# Altium PCB MasterBoard (SurfaceMount).PcbDoc (part 2 of 3)
Units mil, origin at the board's own origin, x right, y up, seen from the top; angles counter-clockwise.
Board outline 2893 x 3176 mil, 4 copper layers (Top Layer, GROUND, POWER, Bottom Layer), stack 23.756 mil thick; 101 components, 58 nets, 327 pads, 95 vias.
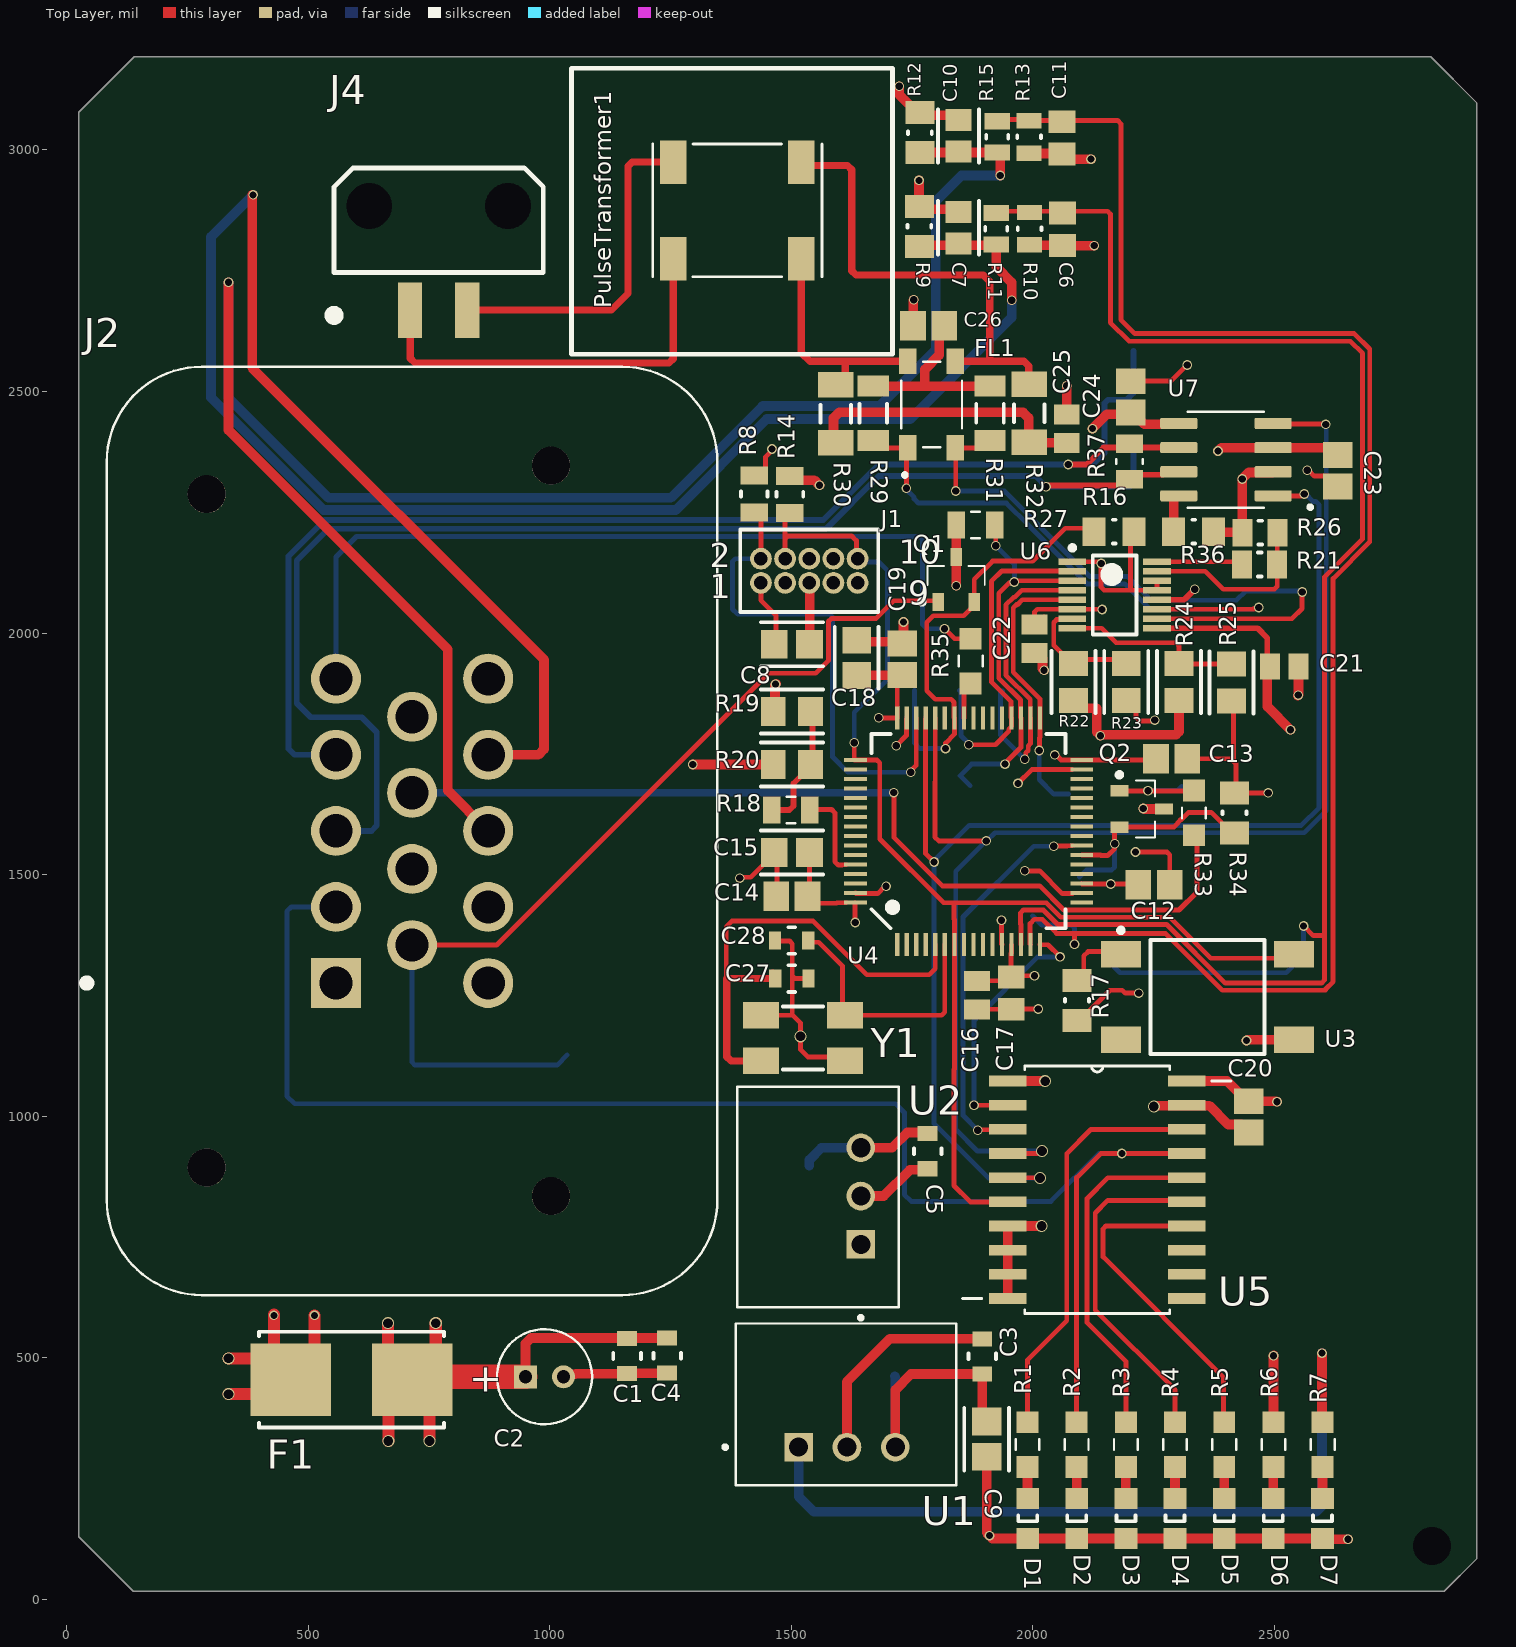
[diagram p0: Top Layer view]

## Part data (continued)
R7: "RES SMD 665 OHM 1% 1/2W 0805", Case Code (Imperial)=0805, Case Code (Metric)=2012, Manufacturer 1=Panasonic, Manufacturer Part Number 1=ERJ-P06F6650V, Max Operating Temperature=155°C, Max Power Dissipation=500mW, Min Operating Temperature=-55°C, Package=None, Package Quantity=5000, Resistance=160R, Resistor Type="Thick Film", Supplier Part Number 1=P16076CT-ND, Temperature Coefficient=200ppm/°C, Tolerance=5%, Voltage Rating=150V, Availability=Unavailable, Case/Package=0805, Category="Chip SMD Resistors", ComponentLink1Description=http://www.mouser.com/ds/2/315/AOA0000CE4-64075.pdf?src-supplier=Mouser, ComponentLink1URL=http://www.mouser.com/ds/2/315/AOA0000CE4-64075.pdf?src-supplier=Mouser, ComponentLink2Description=http://www.onlinecomponents.com/datasheet/erj-p06j161v.aspx?p=44459141&src-supplier=Onlinecomponents.com, ComponentLink2URL=http://www.onlinecomponents.com/datasheet/erj-p06j161v.aspx?p=44459141&src-supplier=Onlinecomponents.com, ComponentLink3Description=https://industrial.panasonic.com/cdbs/www-data/pdf/RDO0000/AOA0000C331.pdf?src-supplier=Digi-Key, ComponentLink3URL=https://industrial.panasonic.com/cdbs/www-data/pdf/RDO0000/AOA0000C331.pdf?src-supplier=Digi-Key, ComponentLink4Description=https://industrial.panasonic.com/ww/system/files/data/download/catalog/id_fixed-resistors_e_1.pdf?src-supplier=Digi-Key, ComponentLink4URL=https://industrial.panasonic.com/ww/system/files/data/download/catalog/id_fixed-resistors_e_1.pdf?src-supplier=Digi-Key, ComponentLink5Description=http://industrial.panasonic.com/www-data/pdf/AOA0000/AOA0000CE4.pdf?src-supplier=Avnet, ComponentLink5URL=http://industrial.panasonic.com/www-data/pdf/AOA0000/AOA0000CE4.pdf?src-supplier=Avnet, ComponentLink6Description=http://industrial.panasonic.com/www-data/pdf/AOA0000/AOA0000CE4.pdf?src-supplier=Avnet+Europe, ComponentLink6URL=http://industrial.panasonic.com/www-data/pdf/AOA0000/AOA0000CE4.pdf?src-supplier=Avnet+Europe, ComponentLink7Description=https://datasheet.ciiva.com/24126/aoa0000ce4-64075-24126826.pdf?src-supplier=Mouser, ComponentLink7URL=https://datasheet.ciiva.com/24126/aoa0000ce4-64075-24126826.pdf?src-supplier=Mouser, ComponentLink8Description=https://datasheet.ciiva.com/22721/1801181-22721149.pdf?src-supplier=Farnell, ComponentLink8URL=https://datasheet.ciiva.com/22721/1801181-22721149.pdf?src-supplier=Farnell, ComponentLink9Description=https://datasheet.ciiva.com/46383/1801181-46383229.pdf?src-supplier=Element14, ComponentLink9URL=https://datasheet.ciiva.com/46383/1801181-46383229.pdf?src-supplier=Element14, Contact Plating=Tin, Features="Automotive AEC-Q200", Height=0.028inch, Lead Free="Contains Lead", Length=0.079inch, Mount="Surface Mount", MP=ERJP06J161V, Number of Terminations=2, Packaging="Tape and Reel", Power Rating=500mW, Price=None, Pricing 1="1=0.18000, 10=0.15400, 100=0.06030, 1000=0.02525, 2500=0.02315 (USD)", Radiation Hardening=No, REACH SVHC="No SVHC", RoHS=Yes, RoHS Compliant=Yes, Series=ERJ, Stock 1=364, Supplier 1=Digi-Key, Termination=SMD/SMT, Voltage Rating (DC)=150V, Weight=0.000194oz, Width=1.2mm
R8 R14: library part CMP-2001-04899-2, "RES Thick Film, 100kΩ, 1%, 0.125W, 100ppm/°C, 0805", Case Code (Imperial)=0805, Case Code (Metric)=2012, Manufacturer 1=Vishay, Max Operating Temperature=155°C, Max Power Dissipation=125mW, Min Operating Temperature=-55°C, Package Quantity=5000, Resistance=100kR, Resistance Tolerance=1%, Resistor Type="Thick Film", Supplier Part Number 1=541-100KCCT-ND, Temperature Coefficient=100ppm/°C, Voltage Rating=150V, Case/Package=0805, Category="Chip SMD Resistors", ComponentLink1Description=https://datasheet.ciiva.com/11809/0900766b80d98b26-11809057.pdf?src-supplier=RSComponents, ComponentLink1URL=https://datasheet.ciiva.com/11809/0900766b80d98b26-11809057.pdf?src-supplier=RSComponents, ComponentLink2Description=https://datasheet.ciiva.com/8337/dcrcwe3-8337738.pdf?src-supplier=Avnet, ComponentLink2URL=https://datasheet.ciiva.com/8337/dcrcwe3-8337738.pdf?src-supplier=Avnet, ComponentLink3Description=https://datasheet.ciiva.com/3258/dcrcwe3-3258006.pdf?src-supplier=Avnet, ComponentLink3URL=https://datasheet.ciiva.com/3258/dcrcwe3-3258006.pdf?src-supplier=Avnet, ComponentLink4Description=https://datasheet.ciiva.com/16754/70201119-16754822.pdf?src-supplier=Allied+Electronics, ComponentLink4URL=https://datasheet.ciiva.com/16754/70201119-16754822.pdf?src-supplier=Allied+Electronics, ComponentLink5Description=https://datasheet.ciiva.com/7777/1697337-7777349.pdf?src-supplier=Element14, ComponentLink5URL=https://datasheet.ciiva.com/7777/1697337-7777349.pdf?src-supplier=Element14, ComponentLink6Description=https://datasheet.ciiva.com/7777/1720486-7777565.pdf?src-supplier=Element14, ComponentLink6URL=https://datasheet.ciiva.com/7777/1720486-7777565.pdf?src-supplier=Element14, ComponentLink7Description=https://datasheet.ciiva.com/16341/dcrcwe3-16341530.pdf?src-supplier=Future+Electronics, ComponentLink7URL=https://datasheet.ciiva.com/16341/dcrcwe3-16341530.pdf?src-supplier=Future+Electronics, ComponentLink8Description=https://datasheet.ciiva.com/16852/dcrcwe3-16852810.pdf?src-supplier=Avnet+Europe, ComponentLink8URL=https://datasheet.ciiva.com/16852/dcrcwe3-16852810.pdf?src-supplier=Avnet+Europe, ComponentLink9Description=https://datasheet.ciiva.com/16720/70201119-16720891.pdf?src-supplier=Allied+Electronics, ComponentLink9URL=https://datasheet.ciiva.com/16720/70201119-16720891.pdf?src-supplier=Allied+Electronics, Composition="Thick Film", Construction=Rectangular, Contact Plating=Tin, Depth=1.25mm, Features="Automotive AEC-Q200", Height=0.45mm, Lead Free="Lead Free", Length=2mm, Manufacturer Part Number 1=CRCW0805100KFKEA, Military Standard=Not, Mount="Surface Mount", Number of Pins=2, Number of Terminations=2, Packaging="Tape and Reel", Power Rating=125mW, Pricing 1="1=0.10000, 10=0.06700, 100=0.02710, 1000=0.01219, 2500=0.01058 (USD)", Radiation Hardening=No, REACH SVHC=Unknown, RoHS=Yes, RoHS Compliant=Yes, Series=CRCW, Size Code=0805, Stock 1=135309, Supplier 1=Digi-Key, Technology="THICK FILM", Termination=SMD/SMT, Tolerance=1%, Voltage Rating (DC)=150V, Weight=0.000194oz, Width=1.25mm
R9 R12: library part CMP-2001-04934-2, "RES Thick Film, 12kΩ, 1%, 0.125W, 100ppm/°C, 0805", Case Code (Imperial)=0805, Case Code (Metric)=2012, Manufacturer 1=Vishay, Max Operating Temperature=155°C, Max Power Dissipation=125mW, Min Operating Temperature=-55°C, Package Quantity=10, Resistance=12kR, Resistance Tolerance=1%, Resistor Type="Thick Film", Supplier Part Number 1=541-12.0KCCT-ND, Temperature Coefficient=100ppm/°C, Voltage Rating=150V, Case/Package=0805, Category="Chip SMD Resistors", ComponentLink1Description=https://datasheet.ciiva.com/11809/0900766b80d98b26-11809216.pdf?src-supplier=RSComponents, ComponentLink1URL=https://datasheet.ciiva.com/11809/0900766b80d98b26-11809216.pdf?src-supplier=RSComponents, ComponentLink2Description=https://datasheet.ciiva.com/2467/dcrcwe3-2467344.pdf?src-supplier=Digi-Key, ComponentLink2URL=https://datasheet.ciiva.com/2467/dcrcwe3-2467344.pdf?src-supplier=Digi-Key, ComponentLink3Description=https://datasheet.ciiva.com/2467/dcrcwe3-2467345.pdf?src-supplier=Digi-Key, ComponentLink3URL=https://datasheet.ciiva.com/2467/dcrcwe3-2467345.pdf?src-supplier=Digi-Key, ComponentLink4Description=https://datasheet.ciiva.com/2467/dcrcwe3-2467346.pdf?src-supplier=Digi-Key, ComponentLink4URL=https://datasheet.ciiva.com/2467/dcrcwe3-2467346.pdf?src-supplier=Digi-Key, ComponentLink5Description=https://datasheet.ciiva.com/16883/dcrcwe3-16883879.pdf?src-supplier=Avnet+Europe, ComponentLink5URL=https://datasheet.ciiva.com/16883/dcrcwe3-16883879.pdf?src-supplier=Avnet+Europe, ComponentLink6Description=https://datasheet.ciiva.com/16397/dcrcw-16397325.pdf?src-supplier=Future+Electronics, ComponentLink6URL=https://datasheet.ciiva.com/16397/dcrcw-16397325.pdf?src-supplier=Future+Electronics, ComponentLink7Description=https://datasheet.ciiva.com/7841/1697337-7841630.pdf?src-supplier=Element14, ComponentLink7URL=https://datasheet.ciiva.com/7841/1697337-7841630.pdf?src-supplier=Element14, ComponentLink8Description=https://datasheet.ciiva.com/16777/70201119-16777994.pdf?src-supplier=Allied+Electronics, ComponentLink8URL=https://datasheet.ciiva.com/16777/70201119-16777994.pdf?src-supplier=Allied+Electronics, Composition="Thick Film", Construction=Rectangular, Contact Plating=Tin, Depth=1.25mm, Features="Automotive AEC-Q200", Height=0.45mm, Lead Free="Lead Free", Length=2mm, Manufacturer Part Number 1=CRCW080512K0FKEA, Military Standard=Not, Mount="Surface Mount", Number of Terminations=2, Packaging="Tape and Reel", Power Rating=125mW, Pricing 1="1=0.10000, 10=0.06700, 100=0.02710, 1000=0.01219, 2500=0.01058 (USD)", Radiation Hardening=No, REACH SVHC=Unknown, RoHS=Yes, RoHS Compliant=Yes, Series=CRCW, Size Code=0805, Stock 1=2287, Supplier 1=Digi-Key, Technology="THICK FILM", Termination=SMD/SMT, Tolerance=1%, Voltage Rating (DC)=150V, Weight=0.000194oz, Width=0.049inch
R10 R13: library part CMP-2001-03873-2, "RES Thick Film, 3.09kΩ, 1%, 0.125W, 100ppm/°C, 0805", Case Code (Imperial)=0805, Case Code (Metric)=2012, Manufacturer 1=Vishay, Max Operating Temperature=155°C, Max Power Dissipation=125mW, Min Operating Temperature=-55°C, Package Quantity=10, Resistance=3.09kR, Resistance Tolerance=1%, Resistor Type="Thick Film", Supplier Part Number 1=541-3.09KCCT-ND, Temperature Coefficient=100ppm/°C, Voltage Rating=150V, Case/Package=0805, Category="Chip SMD Resistors", ComponentLink1Description=https://datasheet.ciiva.com/9081/dcrcwe3-9081688.pdf?src-supplier=Avnet, ComponentLink1URL=https://datasheet.ciiva.com/9081/dcrcwe3-9081688.pdf?src-supplier=Avnet, ComponentLink2Description=https://datasheet.ciiva.com/2467/dcrcwe3-2467557.pdf?src-supplier=Digi-Key, ComponentLink2URL=https://datasheet.ciiva.com/2467/dcrcwe3-2467557.pdf?src-supplier=Digi-Key, ComponentLink3Description=https://datasheet.ciiva.com/2467/dcrcwe3-2467558.pdf?src-supplier=Digi-Key, ComponentLink3URL=https://datasheet.ciiva.com/2467/dcrcwe3-2467558.pdf?src-supplier=Digi-Key, ComponentLink4Description=https://datasheet.ciiva.com/2467/dcrcwe3-2467559.pdf?src-supplier=Digi-Key, ComponentLink4URL=https://datasheet.ciiva.com/2467/dcrcwe3-2467559.pdf?src-supplier=Digi-Key, ComponentLink5Description=https://datasheet.ciiva.com/5549/dcrcwe3-109170-5549629.pdf?src-supplier=Mouser, ComponentLink5URL=https://datasheet.ciiva.com/5549/dcrcwe3-109170-5549629.pdf?src-supplier=Mouser, ComponentLink6Description=https://datasheet.ciiva.com/7670/1697337-7670298.pdf?src-supplier=Element14, ComponentLink6URL=https://datasheet.ciiva.com/7670/1697337-7670298.pdf?src-supplier=Element14, ComponentLink7Description=https://datasheet.ciiva.com/7670/1697337-7670299.pdf?src-supplier=Element14, ComponentLink7URL=https://datasheet.ciiva.com/7670/1697337-7670299.pdf?src-supplier=Element14, ComponentLink8Description=https://datasheet.ciiva.com/22675/1847332-22675199.pdf?src-supplier=Element14, ComponentLink8URL=https://datasheet.ciiva.com/22675/1847332-22675199.pdf?src-supplier=Element14, ComponentLink9Description=https://datasheet.ciiva.com/7178/1635184-7178791.pdf?src-supplier=Newark, ComponentLink9URL=https://datasheet.ciiva.com/7178/1635184-7178791.pdf?src-supplier=Newark, ComponentLink10Description=https://datasheet.ciiva.com/22871/70201119-22871769.pdf?src-supplier=Allied+Electronics, ComponentLink10URL=https://datasheet.ciiva.com/22871/70201119-22871769.pdf?src-supplier=Allied+Electronics, ComponentLink11Description=https://datasheet.ciiva.com/16780/70201119-16780488.pdf?src-supplier=Allied+Electronics, ComponentLink11URL=https://datasheet.ciiva.com/16780/70201119-16780488.pdf?src-supplier=Allied+Electronics, Composition="Thick Film", Construction=Rectangular, Contact Plating=Tin, Depth=1.25mm, Features="Automotive AEC-Q200", Height=0.02inch, Lead Free="Lead Free", Length=2mm, Manufacturer 2=Vishay, Manufacturer 3=Vishay, Manufacturer Part Number 1=CRCW08053K09FKEA, Manufacturer Part Number 2=CRCW08053K09FKEA, Manufacturer Part Number 3=CRCW08053K09FKEA, Military Standard=Not, Number of Pins=2, Number of Terminations=2, Packaging="Tape and Reel", Power Rating=125mW, Pricing 1="1=0.10000, 10=0.06700, 100=0.02710, 1000=0.01219, 2500=0.01058 (USD)", Pricing 2="1=0.10000, 10=0.06700, 100=0.02710, 1000=0.01219, 2500=0.01058 (USD)", Pricing 3="1=0.18000, 10=0.06800, 50=0.06800, 100=0.02800, 1000=0.01500, 10000=0.00900 (USD)", Radiation Hardening=No, REACH SVHC=Unknown, RoHS=Yes, RoHS Compliant=Yes, Series=CRCW, Size Code=0805, Stock 1=4900, Stock 2=4900, Stock 3=6174, Supplier 1=Digi-Key, Supplier 2=Digi-Key, Supplier 3=Mouser, Supplier Part Number 2=541-3.09KCDKR-ND, Supplier Part Number 3=71-CRCW0805-3.09K-E3, Technology="THICK FILM", Termination=Solder, Tolerance=1%, Voltage Rating (DC)=150V, Weight=0.000194oz, Width=0.049inch
R11 R15: library part CMP-1013-00531-2, Case Code (Imperial)=0805, Case Code (Metric)=2012, Manufacturer="Vishay Dale", Manufacturer 1=Vishay, Max Operating Temperature=155°C, Max Power Dissipation=125mW, Min Operating Temperature=-55°C, Package Quantity=5000, Resistance=1.6kR, Resistance Tolerance=1%, Resistor Type="Thick Film", Supplier Part Number 1=541-1.60KCCT-ND, Temperature Coefficient=100ppm/°C, Voltage Rating=150V, Case/Package=0805, Category="Chip SMD Resistors", ComponentLink1Description=https://datasheet.ciiva.com/11808/0900766b80d98b26-11808292.pdf?src-supplier=RSComponents, ComponentLink1URL=https://datasheet.ciiva.com/11808/0900766b80d98b26-11808292.pdf?src-supplier=RSComponents, ComponentLink2Description=https://datasheet.ciiva.com/5542/dcrcwe3-109170-5542582.pdf?src-supplier=Mouser, ComponentLink2URL=https://datasheet.ciiva.com/5542/dcrcwe3-109170-5542582.pdf?src-supplier=Mouser, ComponentLink3Description=https://datasheet.ciiva.com/2495/dcrcwe3-2495824.pdf?src-supplier=Digi-Key, ComponentLink3URL=https://datasheet.ciiva.com/2495/dcrcwe3-2495824.pdf?src-supplier=Digi-Key, ComponentLink4Description=https://datasheet.ciiva.com/2495/dcrcwe3-2495825.pdf?src-supplier=Digi-Key, ComponentLink4URL=https://datasheet.ciiva.com/2495/dcrcwe3-2495825.pdf?src-supplier=Digi-Key, ComponentLink5Description=https://datasheet.ciiva.com/2495/dcrcwe3-2495826.pdf?src-supplier=Digi-Key, ComponentLink5URL=https://datasheet.ciiva.com/2495/dcrcwe3-2495826.pdf?src-supplier=Digi-Key, ComponentLink6Description=https://datasheet.ciiva.com/26312/fld-crcw-e3-data-en-26312927.pdf?src-supplier=Distrelec, ComponentLink6URL=https://datasheet.ciiva.com/26312/fld-crcw-e3-data-en-26312927.pdf?src-supplier=Distrelec, ComponentLink7Description=https://datasheet.ciiva.com/7670/1697337-7670266.pdf?src-supplier=Element14, ComponentLink7URL=https://datasheet.ciiva.com/7670/1697337-7670266.pdf?src-supplier=Element14, ComponentLink8Description=https://datasheet.ciiva.com/7670/1697337-7670267.pdf?src-supplier=Element14, ComponentLink8URL=https://datasheet.ciiva.com/7670/1697337-7670267.pdf?src-supplier=Element14, ComponentLink9Description=https://datasheet.ciiva.com/22700/1697337-22700735.pdf?src-supplier=Element14, ComponentLink9URL=https://datasheet.ciiva.com/22700/1697337-22700735.pdf?src-supplier=Element14, ComponentLink10Description=https://datasheet.ciiva.com/16852/dcrcwe3-16852921.pdf?src-supplier=Avnet+Europe, ComponentLink10URL=https://datasheet.ciiva.com/16852/dcrcwe3-16852921.pdf?src-supplier=Avnet+Europe, ComponentLink11Description=https://datasheet.ciiva.com/7725/66915-7725838.pdf?src-supplier=Element14, ComponentLink11URL=https://datasheet.ciiva.com/7725/66915-7725838.pdf?src-supplier=Element14, ComponentLink12Description=https://datasheet.ciiva.com/22683/1847332-22683309.pdf?src-supplier=Element14, ComponentLink12URL=https://datasheet.ciiva.com/22683/1847332-22683309.pdf?src-supplier=Element14, Construction=Rectangular, Contact Plating=Tin, Depth=1.25mm, Features="Automotive AEC-Q200", Height=0.45mm, Lead Free="Lead Free", Length=2mm, Manufacturer 2=Vishay, Manufacturer 3=Vishay, Manufacturer Part Number 1=CRCW08051K60FKEA, Manufacturer Part Number 2=CRCW08051K60FKEA, Manufacturer Part Number 3=CRCW08051K60FKEA, Military Standard=Not, Number of Pins=2, Number of Terminations=2, Packaging="Tape and Reel", Part Number=CRCW08051K60FKEA, Power Rating=125mW, Pricing 1="1=0.10000, 10=0.06700, 100=0.02710, 1000=0.01219, 2500=0.01058 (USD)", Pricing 2="1=0.10000, 10=0.06700, 100=0.02710, 1000=0.01219, 2500=0.01058 (USD)", Pricing 3="5000=0.00874 (USD)", Radiation Hardening=No, REACH SVHC=Unknown, RoHS=Yes, RoHS Compliant=Yes, Series=CRCW, Size Code=0805, Stock 1=11753, Stock 2=11753, Stock 3=10000, Supplier 1=Digi-Key, Supplier 2=Digi-Key, Supplier 3=Digi-Key, Supplier Part Number 2=541-1.60KCDKR-ND, Supplier Part Number 3=541-1.60KCTR-ND, Technology="THICK FILM", Termination=SMD/SMT, Tolerance=1%, Voltage Rating (DC)=150V, Weight=0.000194oz, Width=0.049inch
R16 R17 R34: library part CMP-2001-04908-2, "RES Thick Film, 10kΩ, 1%, 0.125W, 100ppm/°C, 0805", Case Code (Imperial)=0805, Case Code (Metric)=2012, Manufacturer 1=Vishay, Max Operating Temperature=155°C, Max Power Dissipation=125mW, Min Operating Temperature=-55°C, Package Quantity=5000, Resistance=10kR, Resistance Tolerance=1%, Resistor Type="Thick Film", Supplier Part Number 1=68AH8357, Temperature Coefficient=100ppm/°C, Voltage Rating=150V, Case/Package=0805, Category="Chip SMD Resistors", ComponentLink1Description=https://datasheet.ciiva.com/11808/0900766b80d98b26-11808216.pdf?src-supplier=RSComponents, ComponentLink1URL=https://datasheet.ciiva.com/11808/0900766b80d98b26-11808216.pdf?src-supplier=RSComponents, ComponentLink2Description=https://datasheet.ciiva.com/8337/dcrcwe3-8337773.pdf?src-supplier=Avnet, ComponentLink2URL=https://datasheet.ciiva.com/8337/dcrcwe3-8337773.pdf?src-supplier=Avnet, ComponentLink3Description=https://datasheet.ciiva.com/8337/dcrcwe3-8337774.pdf?src-supplier=Avnet, ComponentLink3URL=https://datasheet.ciiva.com/8337/dcrcwe3-8337774.pdf?src-supplier=Avnet, ComponentLink4Description=https://datasheet.ciiva.com/5547/dcrcwe3-109170-5547559.pdf?src-supplier=Mouser, ComponentLink4URL=https://datasheet.ciiva.com/5547/dcrcwe3-109170-5547559.pdf?src-supplier=Mouser, ComponentLink5Description=https://datasheet.ciiva.com/46394/1720486-46394381.pdf?src-supplier=Element14, ComponentLink5URL=https://datasheet.ciiva.com/46394/1720486-46394381.pdf?src-supplier=Element14, ComponentLink6Description=https://datasheet.ciiva.com/16199/dcrcwe3-16199086.pdf?src-supplier=Future+Electronics, ComponentLink6URL=https://datasheet.ciiva.com/16199/dcrcwe3-16199086.pdf?src-supplier=Future+Electronics, ComponentLink7Description=https://datasheet.ciiva.com/16883/dcrcwe3-16883708.pdf?src-supplier=Avnet+Europe, ComponentLink7URL=https://datasheet.ciiva.com/16883/dcrcwe3-16883708.pdf?src-supplier=Avnet+Europe, ComponentLink8Description=https://datasheet.ciiva.com/16719/70201119-16719082.pdf?src-supplier=Allied+Electronics, ComponentLink8URL=https://datasheet.ciiva.com/16719/70201119-16719082.pdf?src-supplier=Allied+Electronics, ComponentLink9Description=https://datasheet.ciiva.com/16514/dcrcwe3-16514907.pdf?src-supplier=Avnet+Asia, ComponentLink9URL=https://datasheet.ciiva.com/16514/dcrcwe3-16514907.pdf?src-supplier=Avnet+Asia, ComponentLink10Description=https://datasheet.ciiva.com/16755/70201119-16755389.pdf?src-supplier=Allied+Electronics, ComponentLink10URL=https://datasheet.ciiva.com/16755/70201119-16755389.pdf?src-supplier=Allied+Electronics, Composition="Thick Film", Construction=Rectangular, Contact Plating=Tin, Depth=1.25mm, Features="Automotive AEC-Q200", Height=0.45mm, Lead Free="Lead Free", Length=2mm, Manufacturer 2=Vishay, Manufacturer 3=Vishay, Manufacturer 4=Vishay, Manufacturer Part Number 1=CRCW080510K0FKEA, Manufacturer Part Number 2=CRCW080510K0FKEA, Manufacturer Part Number 3=CRCW080510K0FKEA, Manufacturer Part Number 4=CRCW080510K0FKEA, Military Standard=Not, Number of Terminations=2, Packaging="Tape and Reel", Power Rating=125mW, Pricing 1="1=0.18000, 25=0.06500, 50=0.04600, 100=0.02700 (USD)", Pricing 2="1=0.10000, 10=0.06700, 100=0.02710, 1000=0.01219, 2500=0.01058 (USD)", Pricing 3="1=0.10000, 10=0.06700, 100=0.02710, 1000=0.01219, 2500=0.01058 (USD)", Pricing 4="5000=0.00874 (USD)", Radiation Hardening=No, REACH SVHC=Unknown, RoHS=Yes, RoHS Compliant=Yes, Series=CRCW, Size Code=0805, Stock 1=16518, Supplier 1=Newark, Supplier 2=Digi-Key, Supplier 3=Digi-Key, Supplier 4=Digi-Key, Supplier Part Number 2=541-10.0KCCT-ND, Supplier Part Number 3=541-10.0KCDKR-ND, Supplier Part Number 4=541-10.0KCTR-ND, Technology="THICK FILM", Termination=SMD/SMT, Tolerance=1%, Voltage Rating (DC)=150V, Weight=0.000194oz, Width=1.25mm
R18 R27: library part RCS08052K00FKEA, "Res Thick Film 0805 2K Ohm 1% 0.4W ±100ppm/C Pad SMD Automotive T/R", Case Code (Imperial)=0805, Case Code (Metric)=2012, Manufacturer 1="Vishay Dale", Max Operating Temperature=155°C, Max Power Dissipation=400mW, Min Operating Temperature=-55°C, Package=None, Resistance=2kR, Resistor Type="Thick Film", Supplier Part Number 1=541-2840-1-ND, Temperature Coefficient=100ppm/°C, Tolerance=1%, Availability=Unavailable, Case/Package=0805, Category="Chip SMD Resistors", ComponentLink1Description=http://www.vishay.com/docs/20065/rcse3.pdf?src-supplier=Digi-Key, ComponentLink1URL=http://www.vishay.com/docs/20065/rcse3.pdf?src-supplier=Digi-Key, Features="Automotive AEC-Q200", Height=0.02inch, Length=0.079inch, Manufacturer Part Number 1=RCS08052K00FKEA, MP=RCS08052K00FKEA, Number of Terminations=2, Packaging="Tape and Reel", Price=None, Pricing 1="1=0.26000, 10=0.21800, 100=0.08510, 1000=0.03560, 2500=0.03264 (USD)", RoHS=Yes, Stock 1=4243, Supplier 1=Digi-Key, Width=0.049inch
R19 R20 R22 R23 R24 R25: library part CMP-2001-04185-2, "RES Thick Film, 0Ω, 0.5W, 0805", Case Code (Imperial)=0805, Case Code (Metric)=2012, Manufacturer 1="Vishay Dale", Manufacturer Part Number 1=CRCW08050000Z0EAHP, Max Operating Temperature=155°C, Max Power Dissipation=500mW, Min Operating Temperature=-55°C, Package Quantity=5000, Power Rating=330mW, Resistance=0mR, Resistor Type="Thick Film", Supplier Part Number 1=541-0.0TBCT-ND, Temperature Coefficient=0ppm/°C, Tolerance=5%, Voltage Rating=150V, Case/Package=0805, Category="Chip SMD Resistors", ComponentLink1Description=https://datasheet.ciiva.com/2474/crcwhpe3-2474632.pdf?src-supplier=Digi-Key, ComponentLink1URL=https://datasheet.ciiva.com/2474/crcwhpe3-2474632.pdf?src-supplier=Digi-Key, ComponentLink2Description=https://datasheet.ciiva.com/2474/crcwhpe3-2474633.pdf?src-supplier=Digi-Key, ComponentLink2URL=https://datasheet.ciiva.com/2474/crcwhpe3-2474633.pdf?src-supplier=Digi-Key, ComponentLink3Description=https://datasheet.ciiva.com/2474/crcwhpe3-2474634.pdf?src-supplier=Digi-Key, ComponentLink3URL=https://datasheet.ciiva.com/2474/crcwhpe3-2474634.pdf?src-supplier=Digi-Key, ComponentLink4Description=https://datasheet.ciiva.com/9109/crcwhpe3-9109934.pdf?src-supplier=Avnet, ComponentLink4URL=https://datasheet.ciiva.com/9109/crcwhpe3-9109934.pdf?src-supplier=Avnet, ComponentLink5Description=https://datasheet.ciiva.com/5549/crcwhpe3-46056-5549241.pdf?src-supplier=Mouser, ComponentLink5URL=https://datasheet.ciiva.com/5549/crcwhpe3-46056-5549241.pdf?src-supplier=Mouser, ComponentLink6Description=https://datasheet.ciiva.com/16883/crcwhpe3-16883643.pdf?src-supplier=Avnet+Europe, ComponentLink6URL=https://datasheet.ciiva.com/16883/crcwhpe3-16883643.pdf?src-supplier=Avnet+Europe, ComponentLink7Description=https://datasheet.ciiva.com/16498/crcwhpe3-16498294.pdf?src-supplier=Future+Electronics, ComponentLink7URL=https://datasheet.ciiva.com/16498/crcwhpe3-16498294.pdf?src-supplier=Future+Electronics, ComponentLink8Description=https://datasheet.ciiva.com/28621/1750852-28621406.pdf?src-supplier=Element14, ComponentLink8URL=https://datasheet.ciiva.com/28621/1750852-28621406.pdf?src-supplier=Element14, ComponentLink9Description=https://datasheet.ciiva.com/7859/crcwhpe3-7859727.pdf?src-supplier=Element14, ComponentLink9URL=https://datasheet.ciiva.com/7859/crcwhpe3-7859727.pdf?src-supplier=Element14, Composition="Thick Film", Construction=Rectangular, Contact Plating=Tin, Depth=1.25mm, Features="Automotive AEC-Q200", Height=0.024inch, Lead Free="Lead Free", Length=2mm, Military Standard=Not, Mount="Surface Mount", Number of Pins=2, Number of Terminations=2, Packaging="Tape and Reel", Pricing 1="1=0.21000, 10=0.17600, 25=0.12800, 50=0.09280, 100=0.06880, 250=0.05280, 500=0.04160, 1000=0.02880 (USD)", Radiation Hardening=No, REACH SVHC="No SVHC", RoHS=Yes, RoHS Compliant=Yes, Series=CRCW-HP, Size Code=0805, Stock 1=60898, Supplier 1=Digi-Key, Technology="THICK FILM", Termination=Solder, Voltage Rating (DC)=150V, Weight=0.000194oz, Width=0.049inch
R21: library part CMP-2001-04126-1, Case Code (Imperial)=0805, Case Code (Metric)=2012, Manufacturer="Vishay Dale", Manufacturer Part Number 1=TNPW0805806RBEEN, Max Operating Temperature=125°C, Max Power Dissipation=125mW, Min Operating Temperature=-55°C, Package Quantity=1000, Part Number=CRCW0805806RFKEA, Resistance=806R, Resistor Type="Thin Film", Supplier Part Number 1=541-TNPW0805806RBEENTR-ND, Temperature Coefficient=25ppm/°C, Tolerance=0.1%, Voltage Rating=150V, Voltage Rating (DC)=100V, Case/Package=0805, Category="Chip SMD Resistors", ComponentLink1Description=https://datasheet.ciiva.com/2612/tnpw-e3-2612881.pdf?src-supplier=Digi-Key, ComponentLink1URL=https://datasheet.ciiva.com/2612/tnpw-e3-2612881.pdf?src-supplier=Digi-Key, ComponentLink2Description=https://datasheet.ciiva.com/8919/tnpw-e3-8919757.pdf?src-supplier=Avnet, ComponentLink2URL=https://datasheet.ciiva.com/8919/tnpw-e3-8919757.pdf?src-supplier=Avnet, ComponentLink3Description=https://datasheet.ciiva.com/48524/tnpw-e3-48524410.pdf?src-supplier=Avnet, ComponentLink3URL=https://datasheet.ciiva.com/48524/tnpw-e3-48524410.pdf?src-supplier=Avnet, Contact Plating=Tin, Features="Moisture Resistant,Automotive AEC-Q200,Anti-Sulfur", Height=0.022inch, Length=0.079inch, Manufacturer 1="Vishay Dale", Manufacturer 2="Vishay Dale", Manufacturer Part Number 2=TNPW0805806RBEEN, Number of Terminations=2, Packaging="Tape and Reel", Power Rating=125mW, Pricing 1="1000=0.31280 (USD)", Pricing 2="1=0.92000, 10=0.82300, 50=0.82300, 100=0.62200, 500=0.52900, 1000=0.29900, 10000=0.26400 (USD)", Radiation Hardening=No, RoHS=Yes, RoHS Compliant=Yes, Series=TNPW, Stock 2=696, Supplier 1=Digi-Key, Supplier 2=Mouser, Supplier Part Number 2=71-TNPW0805806RBEEN, Termination=SMD/SMT, Width=0.049inch
R26: library part CMP-2001-04126-1, Case Code (Imperial)=0805, Case Code (Metric)=2012, Manufacturer="Vishay Dale", Manufacturer Part Number 1=TNPW0805806RBEEN, Manufacturer Part Number 3=TNPW08051K21BEEA, Max Operating Temperature=125°C, Max Power Dissipation=125mW, Min Operating Temperature=-55°C, Package Quantity=1000, Part Number=CRCW0805806RFKEA, Resistance=806R, Resistance Tolerance=0.1%, Resistor Type="Thin Film", Supplier Part Number 1=541-TNPW0805806RBEENTR-ND, Temperature Coefficient=25ppm/°C, Voltage Rating=150V, Voltage Rating (DC)=100V, Case/Package=0805, Category="Chip SMD Resistors", ComponentLink1Description=https://datasheet.ciiva.com/2612/tnpw-e3-2612881.pdf?src-supplier=Digi-Key, ComponentLink1URL=https://datasheet.ciiva.com/2612/tnpw-e3-2612881.pdf?src-supplier=Digi-Key, ComponentLink2Description=https://datasheet.ciiva.com/8919/tnpw-e3-8919757.pdf?src-supplier=Avnet, ComponentLink2URL=https://datasheet.ciiva.com/8919/tnpw-e3-8919757.pdf?src-supplier=Avnet, ComponentLink3Description=https://datasheet.ciiva.com/48524/tnpw-e3-48524410.pdf?src-supplier=Avnet, ComponentLink3URL=https://datasheet.ciiva.com/48524/tnpw-e3-48524410.pdf?src-supplier=Avnet, ComponentLink4Description=https://datasheet.ciiva.com/9105/tnpw-e3-9105739.pdf?src-supplier=Avnet, ComponentLink4URL=https://datasheet.ciiva.com/9105/tnpw-e3-9105739.pdf?src-supplier=Avnet, ComponentLink5Description=https://datasheet.ciiva.com/2608/tnpw-e3-2608321.pdf?src-supplier=Digi-Key, ComponentLink5URL=https://datasheet.ciiva.com/2608/tnpw-e3-2608321.pdf?src-supplier=Digi-Key, ComponentLink6Description=https://datasheet.ciiva.com/41828/tnpw-e3-41828137.pdf?src-supplier=Digi-Key, ComponentLink6URL=https://datasheet.ciiva.com/41828/tnpw-e3-41828137.pdf?src-supplier=Digi-Key, Contact Plating=Tin, Features="Moisture Resistant,Automotive AEC-Q200,Anti-Sulfur", Height=0.022inch, Length=0.079inch, Manufacturer 1="Vishay Dale", Manufacturer 2="Vishay Dale", Manufacturer 3="Vishay Dale", Manufacturer Part Number 2=TNPW0805806RBEEN, Number of Terminations=2, Packaging="Tape and Reel", Power Rating=125mW, Pricing 1="1000=0.31280 (USD)", Pricing 2="1=0.92000, 10=0.82300, 50=0.82300, 100=0.62200, 500=0.52900, 1000=0.29900, 10000=0.26400 (USD)", Pricing 3="1=0.74000, 10=0.54800, 100=0.31930, 1000=0.17905, 2500=0.17544 (USD)", Radiation Hardening=No, REACH SVHC=Unknown, RoHS=Yes, RoHS Compliant=Yes, Series=TNPW, Stock 2=696, Stock 3=4750, Supplier 1=Digi-Key, Supplier 2=Mouser, Supplier 3=Digi-Key, Supplier Part Number 2=71-TNPW0805806RBEEN, Supplier Part Number 3=541-2057-1-ND, Termination=SMD/SMT, Tolerance=0.1%, Width=0.049inch
R29 R31: library part CMP-2003-00451-1, Case Code (Imperial)=1206, Case Code (Metric)=3216, Manufacturer=Panasonic, Max Operating Temperature=155°C, Max Power Dissipation=250mW, Min Operating Temperature=-55°C, Package Quantity=1, Resistance=62R, Resistance Tolerance=1%, Resistor Type="Thick Film", Supplier Part Number 1=P62.0FCT-ND, Temperature Coefficient=100ppm/°C, Voltage Rating=200V, Case/Package=1206, Category="Chip SMD Resistors", ComponentLink1Description=https://datasheet.ciiva.com/9188/aoa0000ce2-9188406.pdf?src-supplier=Avnet, ComponentLink1URL=https://datasheet.ciiva.com/9188/aoa0000ce2-9188406.pdf?src-supplier=Avnet, ComponentLink2Description=https://datasheet.ciiva.com/22762/1678782-22762886.pdf?src-supplier=Farnell, ComponentLink2URL=https://datasheet.ciiva.com/22762/1678782-22762886.pdf?src-supplier=Farnell, ComponentLink3Description=https://datasheet.ciiva.com/46440/1678782-46440394.pdf?src-supplier=Element14, ComponentLink3URL=https://datasheet.ciiva.com/46440/1678782-46440394.pdf?src-supplier=Element14, Construction=Rectangular, Contact Plating=Tin, Depth=1.6mm, Features="Automotive AEC-Q200", Height=0.028inch, Lead Free="Lead Free", Length=3.2mm, Manufacturer 1=Panasonic, Manufacturer 2=Panasonic, Manufacturer 3=Panasonic, Manufacturer 4=Panasonic, Manufacturer Part Number 1=ERJ-8ENF62R0V, Manufacturer Part Number 2=ERJ-8ENF62R0V, Manufacturer Part Number 3=ERJ-8ENF62R0V, Manufacturer Part Number 4=ERJ-8ENF62R0V, Military Standard=Not, Mount="Surface Mount", Number of Terminations=2, Packaging="Tape and Reel", Part Number=ERJ-8ENF62R0V, Power Rating=250mW, Pricing 1="1=0.10000, 10=0.09300, 100=0.03560, 1000=0.01569, 2500=0.01355 (USD)", Pricing 2="1=0.10000, 10=0.09300, 100=0.03560, 1000=0.01569, 2500=0.01355 (USD)", Pricing 3="1=0.00800, 25=0.00800, 50=0.00800, 100=0.00800, 250=0.00800, 500=0.00800, 1000=0.00800 (USD)", Pricing 4="1=0.10000, 10=0.09300, 50=0.09300, 100=0.03800, 250=0.03700, 500=0.03600, 1000=0.01600, 2500=0.01400, 5000=0.01300, 10000=0.01300 (USD)", Radiation Hardening=No, REACH SVHC=Yes, RoHS=Yes, RoHS Compliant=Yes, Series=ERJ, Stock 1=91284, Stock 2=91284, Stock 3=46632, Stock 4=31443, Supplier 1=Digi-Key, Supplier 2=Digi-Key, Supplier 3=Newark, Supplier 4=Mouser, Supplier Part Number 2=P62.0FDKR-ND, Supplier Part Number 3=90W3970, Supplier Part Number 4=667-ERJ-8ENF62R0V, Termination=SMD/SMT, Tolerance=1%, Voltage Rating (DC)=200V, Width=1.6mm
R30 R32: library part CMP-1014-00449-3, "RES Thick Film, 300Ω, 1%, 0.25W, 100ppm/°C, 1206", Case Code (Imperial)=1206, Case Code (Metric)=3216, Max Operating Temperature=155°C, Max Power Dissipation=250mW, Min Operating Temperature=-55°C, Package Quantity=10, Resistance=300R, Temperature Coefficient=100ppm/°C, Tolerance=1%, Voltage Rating=200V, Case/Package=1206, Composition="Thick Film", Contact Plating=Tin, Depth=1.6mm, Features="Automotive AEC-Q200", Height=0.55mm, Lead Free="Lead Free", Length=3.2mm, Military Standard=Not, Mount="Surface Mount", Number of Terminations=2, Packaging="Tape and Reel", Power Rating=250mW, Radiation Hardening=No, Termination=SMD/SMT, Voltage Rating (DC)=200V, Weight=0.000353oz, Width=0.063inch, Working Voltage=200V
R36: library part CMP-2001-04908-2, "RES Thick Film, 10kΩ, 1%, 0.125W, 100ppm/°C, 0805", Case Code (Imperial)=0805, Case Code (Metric)=2012, Manufacturer 1=Vishay, Manufacturer Part Number 1=CRCW080510K0FKEA, Max Operating Temperature=155°C, Max Power Dissipation=125mW, Min Operating Temperature=-55°C, Package Quantity=5000, Resistance=10kR, Resistance Tolerance=1%, Resistor Type="Thick Film", Supplier Part Number 1=25AC7644, Temperature Coefficient=100ppm/°C, Voltage Rating=150V, Case/Package=0805, Category="Chip SMD Resistors", ComponentLink1Description=https://datasheet.ciiva.com/11808/0900766b80d98b26-11808216.pdf?src-supplier=RSComponents, ComponentLink1URL=https://datasheet.ciiva.com/11808/0900766b80d98b26-11808216.pdf?src-supplier=RSComponents, ComponentLink2Description=https://datasheet.ciiva.com/8337/dcrcwe3-8337773.pdf?src-supplier=Avnet, ComponentLink2URL=https://datasheet.ciiva.com/8337/dcrcwe3-8337773.pdf?src-supplier=Avnet, ComponentLink3Description=https://datasheet.ciiva.com/8337/dcrcwe3-8337774.pdf?src-supplier=Avnet, ComponentLink3URL=https://datasheet.ciiva.com/8337/dcrcwe3-8337774.pdf?src-supplier=Avnet, ComponentLink4Description=https://datasheet.ciiva.com/5547/dcrcwe3-109170-5547559.pdf?src-supplier=Mouser, ComponentLink4URL=https://datasheet.ciiva.com/5547/dcrcwe3-109170-5547559.pdf?src-supplier=Mouser, ComponentLink5Description=https://datasheet.ciiva.com/46394/1720486-46394381.pdf?src-supplier=Element14, ComponentLink5URL=https://datasheet.ciiva.com/46394/1720486-46394381.pdf?src-supplier=Element14, ComponentLink6Description=https://datasheet.ciiva.com/16199/dcrcwe3-16199086.pdf?src-supplier=Future+Electronics, ComponentLink6URL=https://datasheet.ciiva.com/16199/dcrcwe3-16199086.pdf?src-supplier=Future+Electronics, ComponentLink7Description=https://datasheet.ciiva.com/16883/dcrcwe3-16883708.pdf?src-supplier=Avnet+Europe, ComponentLink7URL=https://datasheet.ciiva.com/16883/dcrcwe3-16883708.pdf?src-supplier=Avnet+Europe, ComponentLink8Description=https://datasheet.ciiva.com/16719/70201119-16719082.pdf?src-supplier=Allied+Electronics, ComponentLink8URL=https://datasheet.ciiva.com/16719/70201119-16719082.pdf?src-supplier=Allied+Electronics, ComponentLink9Description=https://datasheet.ciiva.com/16514/dcrcwe3-16514907.pdf?src-supplier=Avnet+Asia, ComponentLink9URL=https://datasheet.ciiva.com/16514/dcrcwe3-16514907.pdf?src-supplier=Avnet+Asia, ComponentLink10Description=https://datasheet.ciiva.com/16755/70201119-16755389.pdf?src-supplier=Allied+Electronics, ComponentLink10URL=https://datasheet.ciiva.com/16755/70201119-16755389.pdf?src-supplier=Allied+Electronics, Composition="Thick Film", Construction=Rectangular, Contact Plating=Tin, Depth=1.25mm, Features="Automotive AEC-Q200", Height=0.45mm, Lead Free="Lead Free", Length=2mm, Manufacturer 2=Vishay, Manufacturer Part Number 2=CRCW080510K0FKEA, Military Standard=Not, Number of Terminations=2, Packaging="Tape and Reel", Power Rating=125mW, Pricing 1="1=0.01100, 5000=0.01100 (USD)", Pricing 2="1=0.10000, 10=0.06700, 100=0.02710, 1000=0.01219, 2500=0.01058 (USD)", Radiation Hardening=No, REACH SVHC=Unknown, RoHS=Yes, RoHS Compliant=Yes, Series=CRCW, Size Code=0805, Stock 1=1440000, Supplier 1=Newark, Supplier 2=Digi-Key, Supplier Part Number 2=541-10.0KCCT-ND, Technology="THICK FILM", Termination=SMD/SMT, Tolerance=1%, Voltage Rating (DC)=150V, Weight=0.000194oz, Width=1.25mm
R37: library part TNPW08051K21BEEA, Package=None, Availability=Unavailable, MP=TNPW08051K21BEEA, Price=None
U1: "1A DC/DC-Converter 'INNOLINE' SIP3 reg", Package="SIP-3 Recom Power", Supplier Part Number 1=945-2201-ND, Availability=Unavailable, MF="Recom Power", MP=R-78E5.0-1.0, Price=None, SnapEDA_Link=https://www.snapeda.com/parts/R-78E5.0-1.0/Recom%20Power/view-part/557753/?ref=snap, Supplier 1=Digi-Key
U2: "1A DC/DC-Converter 'INNOLINE' SIP3 reg", Package="SIP-3 Recom Power", Supplier Part Number 1=945-2409-5-ND, Digi-Key_Part_Number=945-2409-5-ND, Digi-Key_Purchase_URL=https://www.digikey.com/en/products/detail/recom-power/R-78E3-3-1-0/5327711, MF="Recom Power", MP=R-78E3.3-1.0, SnapEDA_Link=https://www.snapeda.com/parts/R-78E3.3-0.5/Recom%20Power/view-part/229066/?ref=snap, Supplier 1=Digi-Key
U3: library part CMP-2000-07488-1, "Swicth, SPST, 24 V, -35 to 85 degC, 4-Pin SMD, RoHS, Tape and Reel", Color=Black, Contact Current Rating=50mA, Contact Resistance=100mR, Insulation Resistance=100MR, Manufacturer 1=E-Switch, Max Operating Temperature=70°C, Max Voltage Rating (DC)=50V, Min Operating Temperature=-20°C, Operating Force=260gf, Package Quantity=1, Supplier Part Number 1=EG1868CT-ND, Voltage Rating (DC)=12V, Actuator Length=0.7mm, Actuator Material=Nylon,Polyamide, Actuator Type=Standard, Category="Tactile Switches", ComponentLink1Description=https://datasheet.ciiva.com/2901/p010517e-2901296.pdf?src-supplier=Digi-Key, ComponentLink1URL=https://datasheet.ciiva.com/2901/p010517e-2901296.pdf?src-supplier=Digi-Key, ComponentLink2Description=https://datasheet.ciiva.com/2901/tl3301-2901294.pdf?src-supplier=Digi-Key, ComponentLink2URL=https://datasheet.ciiva.com/2901/tl3301-2901294.pdf?src-supplier=Digi-Key, ComponentLink3Description=https://datasheet.ciiva.com/2901/tl3301-2901295.pdf?src-supplier=Digi-Key, ComponentLink3URL=https://datasheet.ciiva.com/2901/tl3301-2901295.pdf?src-supplier=Digi-Key, ComponentLink4Description=https://datasheet.ciiva.com/7637/tl3301-7637661.pdf?src-supplier=Element14, ComponentLink4URL=https://datasheet.ciiva.com/7637/tl3301-7637661.pdf?src-supplier=Element14, Contact Material=Silver, Contact Plating=Silver, Current Rating=50mA, Electrical Life=100000Cycles, Illumination Type=Non-Illuminated,Illuminated, Lead Free="Lead Free", Length=6mm, Manufacturer Part Number 1=TL3301NF260QG, Mechanical Life=100000Cycles, Mount="Surface Mount", Orientation=Straight, Packaging="Tape and Reel", Pricing 1="1=0.42000, 10=0.40400, 25=0.38040, 100=0.33030, 250=0.29968, 500=0.27876 (USD)", REACH SVHC="No SVHC", RoHS=Yes, RoHS Compliant=Yes, Series=TL3301, Stock 1=8223, Supplier 1=Digi-Key, Switch Function=Off-Mom, Switch Travel=0.25mm, Termination="Gull Wing", Throw Configuration=SPST, Voltage Rating=50V, Width=6mm
U4: library part CMP-12105-000069-1, "IC MCU 32BIT 256KB FLASH 64LQFP", Ambient Temperature Range High=+85°C, Ambient Temperature Range Low=-40°C, Frequency=48MHz, Manufacturer=STMicroelectronics, Max Junction Temp=+105°C, Max Supply Voltage=3.6V, Min Supply Voltage=2V, Nominal Supply Current=0.9-26.9mA, Package=LQFP64-5W, Supplier Part Number 1=497-15167-ND, Temperature="-40°C to +85°C", Automotive=No, Category=IC, ComponentLink2Description=Datasheet, ComponentLink2URL=https://www.st.com/resource/en/datasheet/stm32f091rc.pdf, Core Architecture="ARM Cortex-M0", Data Bus Width=32bits, Device Class L1="Integrated Circuits (ICs)", Device Class L2="Embedded Processors and Controllers", Device Class L3=Microcontrollers, Digikey Description="IC MCU 32BIT 256KB FLASH 64LQFP", Height=1.6mm, Interface=I2C,SPI,USART,CAN,LIN,IrDA,I2S,SMBus, Ipc Land Pattern Name=QFP50P1200X1200X160-64, Lead Free=Yes, Manufacturer Part Number=STM32F091RCT6, Memory Size=256KBytes, Memory Type=FLASH, Mouser Description="ARM Microcontrollers - MCU 16/32-BITS MICROS", Number Of A/D Converters=1, Number Of Adc Channels=19, Number Of Cores=1, Number Of I2C Channels=2, Number Of I/Os=52, Number Of Pwm Channels=6, Number Of Spi Channels=2, Number Of Timers/Counters=10, Number Of Uart Channels=8, Octopart=https://octopart.com/stm32f091rct6-stmicroelectronics-51988683, Ram Size=32KBytes, RoHS=TRUE, Standoff Height=0.05mm, Supplier 1=Digi-Key, Temperature Range High=+85°C, Temperature Range Low=-40°C
U5: "Buffer, Non-Inverting 1 Element 8 Bit per Element 3-State Output 20-SOIC", Package="SOIC-20 Fairchild Semiconductor", Arrow_Electronics-Purchase-URL=https://snapeda.com/shop?store=Arrow+Electronics&id=431052, Availability=Warning, DigiKey-Purchase-URL=https://snapeda.com/shop?store=DigiKey&id=431052, MF="ON Semiconductor", Mouser-Purchase-URL=https://snapeda.com/shop?store=Mouser&id=431052, MP=74ACT541SC, Price=None, SnapEDA_Link=https://www.snapeda.com/parts/74ACT541SC/ON%20Semiconductor/view-part/431052/?ref=snap